# Altium PCB NB2DSK-SPK.PcbDoc
Units mil, origin at the board's own origin, x right, y up, seen from the top; angles counter-clockwise.
Board outline 10614.17 x 2937.01 mil, 2 copper layers (Top Layer, Bottom Layer); 27 components, 35 nets, 104 pads, 52 vias.
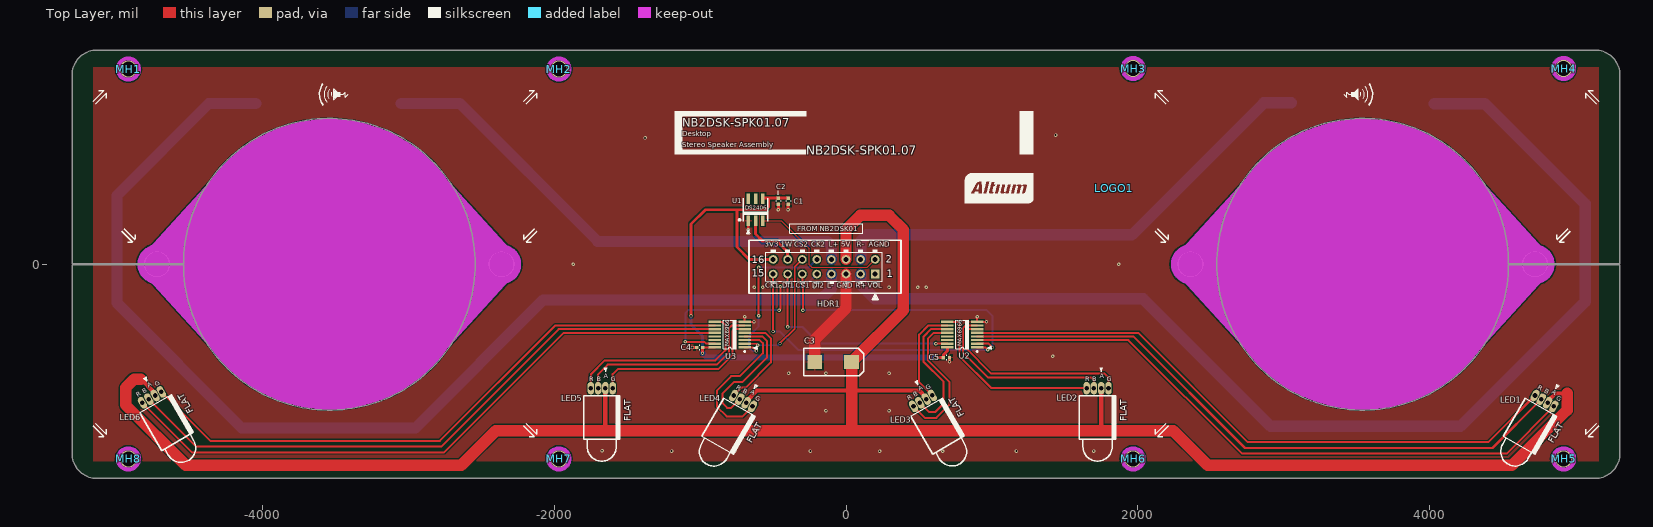
[diagram p0: Top Layer view]
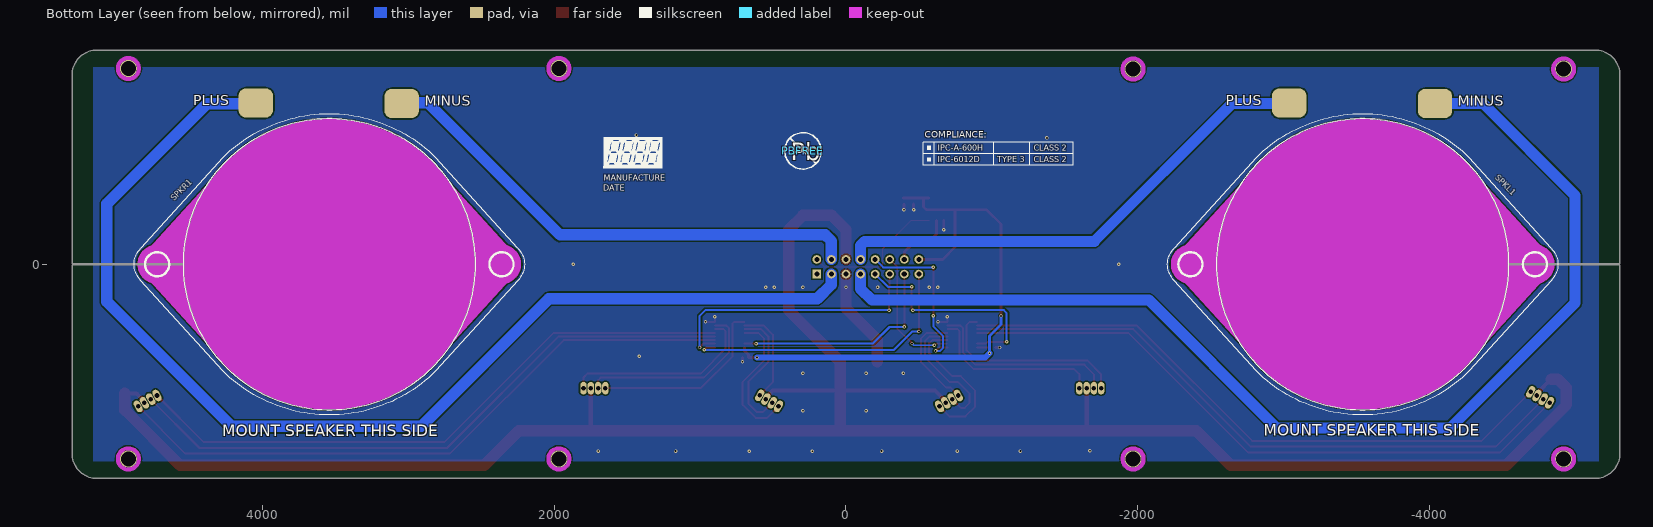
[diagram p1: Bottom Layer view, seen from below]

## Layer stack, top to bottom
Top Layer: signal copper 1.4
Dielectric: core 12.6, FR-4, Dk 4.8
Bottom Layer: signal copper 1.4

## Board outline
-5137.8,-1468.51 cw(c-5137.8,-1299.21) -5307.09,-1299.21 -5307.09,-3.94 -4543.31,-3.94 -4543.3,-3.9 ccw(c-3543.31,0) -4543.3,3.92 -4543.31,3.92 -5307.09,3.92 -5307.09,1299.21 cw(c-5137.8,1299.21) -5137.8,1468.5 5137.8,1468.5 cw(c5137.8,1299.21) 5307.09,1299.21 5307.09,3.92 4543.31,3.92 4543.3,3.92 ccw(c3543.31,0.02) 4543.3,-3.9 4543.31,-3.94 5307.09,-3.94 5307.09,-1299.21 cw(c5137.8,-1299.21) 5137.8,-1468.51

## Design rules (kind name [scope] priority, off if disabled: settings)
Clearance "Pad-Pad Clearance Same Net" [IsPad vs IsPad] p1 off: gap=3.94
Clearance "General Clearance" [All] p2: gap=5
ComponentClearance [All] p1 off: gap=7.87 collisioncheckmode=3 verticalgap=10 showdistances=FALSE
DiffPairsRouting [All] p1: maxlimit=5 minlimit=5 mostfreqgap=5 maxuncoupledlength=200
FabricationTestPointUsage TestPointUsage [All] p1 off: valid=0 allowmultiple=FALSE
FabricationTestpoint Testpoint [All] p1 off: side=3 testpointundercomponent=TRUE minsize=40 maxsize=100 preferedsize=60 minholesize=0 maxholesize=40 preferedholesize=32 testpointgrid=1 allowsidetop=TRUE allowsidebottom=TRUE usegrid=TRUE gridtolerance=0.01
HoleSize [All] p1: absolutevalues=TRUE maxlimit=204.72 minlimit=7.87 maxpercent=80.000 minpercent=20.000
MatchedLengths DiffPair_MatchedLengths [(IsDifferentialPair And (Name = 'DIFF_RX1'))] p1: tolerance=1000 checknetsindiffpair=TRUE checkdiffpairvsdiffpair=TRUE checkothers=TRUE
MinimumAnnularRing [All] p1: minimumring=4.72
PlaneClearance [All] p1: clearance=11.81
PlaneConnect [All] p1: planeconnectstyle=Direct reliefexpansion=19.68 reliefentries=4 reliefconductorwidth=9.84 reliefairgap=9.84
PolygonConnect PolygonConnect_Tight [IsVia] p1: connectstyle=Direct reliefconductorwidth=11.81 reliefentries=4 polygonreliefangle="90 Angle"
PolygonConnect "PolygonConnect - Heatsink" [(HasFootprint('TO-263') AND InNet('VCCINT'))] p2: connectstyle=Relief reliefconductorwidth=10 reliefentries=4 polygonreliefangle="90 Angle"
PolygonConnect [IsPAD] p3: connectstyle=Relief reliefconductorwidth=11.81 reliefentries=4 polygonreliefangle="90 Angle"
RoutingLayers [All] p1: top layer_v5=FALSE bottom layer_v5=FALSE
RoutingVias [All] p1: holewidth=11.81 width=23.62 viastyle="Through Hole" minholewidth=11.81 minwidth=23.62 maxholewidth=19.68 maxwidth=35.43
ShortCircuit ShortCircuit_1 [Net = 'No Net' vs Net = 'No Net'] p1: allowed=TRUE
ShortCircuit [All] p2: allowed=FALSE
SilkscreenOverComponentPads [All] p1: minsilkscreentomaskgap=10
SolderMaskExpansion SolderMaskExpansion_Vias [IsVia] p1: expansion=-25.59
SolderMaskExpansion [All] p2: expansion=2.01
Width [All] p1: maxlimit=98.43 minlimit=5 preferedwidth=5
18 further rules are at their usual default settings.

## Classes and differential pairs
component class U_1WB_DS2406_EPROM: C1 C2 U1
differential pair class DIFF_IN: DIFF_RX0 DIFF_RX1 DIFF_RX2 DIFF_RX3
differential pair class DIFF_OUT: DIFF_TX0 DIFF_TX1 DIFF_TX2 DIFF_TX3

## Components (designator, comment, footprint, x,y, rotation, side; value= is the part's Value field where it differs from the comment)
C1 "0.1uF 16V" CAPC1005-STAR -395.25,433.09 r90 top
C2 "10nF 16V" CAPC1005-STAR -464.13,433.07 r270 top
C3 "220uF 10V" CAPC7343-STAR -88.59,-669.32 r180 top (schematic designator C1)
C4 "0.1uF 16V" CAPC1005-STAR -1003.94,-570.87 r0 top locked (schematic designator C2)
C5 "0.1uF 16V" CAPC1005-STAR 688.98,-639.76 r180 top locked (schematic designator C3)
HDR1 "2x8 Header 0.1\" Staight" HDR2X8 200,-67.01 r180 top
LED1 "RGB LED 5MM" LED-RGB-5MM-RA 4725,-900 r330 top locked
LED2 "RGB LED 5MM" LED-RGB-5MM-RA 1650,-850 r0 top locked
LED3 "RGB LED 5MM" LED-RGB-5MM-RA 462.6,-974.41 r30 top locked
LED4 "RGB LED 5MM" LED-RGB-5MM-RA -770.87,-900 r330 top locked
LED5 "RGB LED 5MM" LED-RGB-5MM-RA -1750,-850 r0 top locked
LED6 "RGB LED 5MM" LED-RGB-5MM-RA -4825,-950 r30 top locked
LOGO1 "Altium" Logo-Altium 1840.64,521.68 r0 top
MH1 "MOUNTING_HOLE_2MM" MOUNTING_HOLE_2MM#1 -4921.26,1338.58 r0 top locked
MH2 "MOUNTING_HOLE_2MM" MOUNTING_HOLE_2MM#2 -1968.5,1338.58 r0 top locked
MH3 "MOUNTING_HOLE_2MM" MOUNTING_HOLE_2MM#2 1968.5,1342.52 r0 top locked
MH4 "MOUNTING_HOLE_2MM" MOUNTING_HOLE_2MM#2 4921.26,1342.52 r0 top locked
MH5 "MOUNTING_HOLE_2MM" MOUNTING_HOLE_2MM#2 4921.26,-1334.65 r0 top locked
MH6 "MOUNTING_HOLE_2MM" MOUNTING_HOLE_2MM#2 1968.5,-1334.65 r0 top locked
MH7 "MOUNTING_HOLE_2MM" MOUNTING_HOLE_2MM#2 -1968.5,-1334.65 r0 top locked
MH8 "MOUNTING_HOLE_2MM" MOUNTING_HOLE_2MM#2 -4921.26,-1334.65 r0 top locked
PBFREE "" LEAD_FREE_S 295.29,777.6 r180 bottom
SPKL1 "SPEAKER_4R_50_60" SPEAKER_4R_50_60 -3543.31,0 r180 bottom locked (schematic designator SPKL)
SPKR1 "SPEAKER_4R_50_60" SPEAKER_4R_50_60 3543.31,0 r180 bottom locked (schematic designator SPKR)
U1 "DS2406" TSOC6 -620.08,374.02 r0 top locked
U2 "MAX6966, QSOP16" QSOP16 797.24,-482.28 r90 top locked (schematic designator U1)
U3 "MAX6966, QSOP16" QSOP16 -797.24,-482.28 r90 top locked (schematic designator U2)

## Footprints (in the part's own frame and the unit in brackets; to place one, negate y for a bottom-side part, rotate by r counter-clockwise, add the part's x,y. Pads: shape width x height; smd on the part's side, far side on the other; paste and mask are expansions set on the pad)
CAPC1005-STAR [mm] "Chip Capacitor 1005"
  rect 0.6x0.6 smd mask+0.038: 1(-0.525,0) 2(0.525,0)
  silkscreen extent -0.05,-0.38 0.05,0.38, body extent -0.57,-0.3 0.57,0.3, height 0.2
CAPC7343-STAR [mm] "Capcacitor SMD 7.3 x 4.3mm (D-Case)"
  rect 2.6x2.4 smd: 1(-3.202,0.007) 2(3.198,0.007)
  silkscreen extent -5.33,-2.39 5.08,2.41, body extent -3.5,-2.03 3.51,2.04, height 1.75
HDR2X8 [mm]
  rect 1.5x1.5 hole 0.9 mask+0.038: 1(0,0)
  round 1.5 hole 0.9 mask+0.038: 2(0,-2.54) 3(2.54,0) 4(2.54,-2.54) 5(5.08,0) 6(5.08,-2.54) 7(7.62,0) 8(7.62,-2.54) 9(10.16,0) 10(10.16,-2.54) 11(12.7,0) 12(12.7,-2.54) 13(15.24,0) 14(15.24,-2.54) 15(17.78,0) 16(17.78,-2.54)
  silkscreen extent -1.27,-3.81 19.05,1.27, body extent -1.27,-3.78 19.05,1.24, height 4.95
LEAD_FREE_S [mil]
  silkscreen extent -125,-125 125,125
LED-RGB-5MM-RA [mil] "LED RGB Right Angle 5mm"
  oval 44x85 hole 31.5 paste+0 mask+0: A(100,0) B(50,0) G(150,0) R(0,0)
  silkscreen extent -50,-500 200,-50
Logo-Altium [mil]
  silkscreen extent -1025,-99 -556,102
MOUNTING_HOLE_2MM#1 [mm] "Non-plated mounting hole for 2mm screw"
  round 3 hole 2.65 unplated mask+0: MOUNT(0,0)
  Top Layer keep-out circle w0.6: c0,0 r1.8
  Bottom Layer keep-out circle w0.6: c0,0 r1.8
  Keep-Out Layer circle w0.6: c0,0 r1.9
MOUNTING_HOLE_2MM#2 [mm] "Non-plated mounting hole for 2mm screw"
  round 3 hole 2.65 unplated paste+0 mask+0: MOUNT(0,0)
  Top Layer keep-out circle w0.6: c0,0 r1.8
  Bottom Layer keep-out circle w0.6: c0,0 r1.8
  Keep-Out Layer circle w0.6: c0,0 r1.9
QSOP16 [mm]
  rect 0.4x2.2 smd mask+0.038: 1(-2.222,-2.6) 2(-1.587,-2.6) 3(-0.952,-2.6) 4(-0.317,-2.6) 5(0.318,-2.6) 6(0.953,-2.6) 7(1.588,-2.6) 8(2.222,-2.6) 9(2.222,2.6) 10(1.587,2.6) 11(0.952,2.6) 12(0.317,2.6) 13(-0.318,2.6) 14(-0.953,2.6) 15(-1.588,2.6) 16(-2.222,2.6)
  silkscreen extent -3.1,-2.73 2.5,1.1, body extent -2.74,-2.4 2.67,2.64, height 0.73
SPEAKER_4R_50_60 [mm] "Header For Connecting Speakers to NB2"
  rrect50% 6x5.08 smd mask+0.038: 1(-12.8,28.1) 2(12.6,28)
  round 4.5 hole 4.2 unplated: M1(-30,0) M1(30,0)
  Keep-Out Layer circle w26: c0,0 r12.3
  Keep-Out Layer lines w8: 13.6,-16.4 28.5,0 13.6,16.4 ; -13.6,-16.4 -28.5,0 -13.6,16.4
  silkscreen extent -34,-26.25 34,26.25, body extent -33.96,-26 33.96,26, height 31.5
TSOC6 [mil]
  rect 25x71 smd mask+1.5: 1(-50,-75) 2(0,-75) 3(50,-75) 4(50,75) 5(0,75) 6(-50,75)
  silkscreen extent -115,-80 85,80, body extent -79,-90 84,91, height 40

## Part data
C1 C4 C5: library part D-101-0080, "Capacitor, Ceramic, 0.1uF 10% 16V 0402 (1005) X7R"
C2: library part D-101-0077, "Capacitor, Ceramic, 10nF 10% 16V 0402 (1005) X7R"
C3: library part D-101-0088, "Capacitor, Tantalum, 220uF 10% 10V MCCT-D (7343-31)"
HDR1: library part D-300-0041, "Header, BOX 2x8, 0.1\", Straight, Raised"
LED1 LED2 LED3 LED4 LED5 LED6: library part D-153-0001, "LED, RGB, 5mm, 540R2GBC-CA, Common Anode"
LOGO1: library part D-000-0003, "Altium Logo for PCB"
MH1 MH2 MH3 MH4 MH5 MH6 MH7 MH8: "2mm Diameter Mounting Hole"
SPKL1 SPKR1: library part D-003-0001, "Speaker, 4 Omh 3W 50mm Cone 60mm Body"
U1: library part D-263-0002, "Dual Addressable Switch Plus 1KB Memory"
U2 U3: library part D-243-0001, "MAX6966, 10 port Constant Current LED Driver, SPI"

## Via types
v1: diameter 23.62, hole 11.81, Top Layer to Bottom Layer, 51 vias
v2: diameter 28, hole 12, Top Layer to Bottom Layer, 1 vias

## Nets (pads, with @x,y where several pads share a name; then routed paths per layer and width w, separated by ;. In a path a pad name is that pad's centre, name@x,y a point inside that pad or via, vN(x,y) a via of type N, cw(c..) or ccw(c..) an arc to the next point about the centre after c; other vN are vias at no path point)
3V3: C1.2 C2.1 C4.2 C5.2 HDR1.16 U1.4 U2.16 U3.16 | length 4139.7
  Top Layer w13.78: C4.2@-982.19,-569.78 U3.16
  Top Layer w19.68: v1(-1062.99,-354.33) -1062.99,275.59 -964.57,374.02 -748,374.02 ; v1(-984.25,-610.24) -984.25,-571.85 C4.2 ; -748.03,344.49 -748.03,118.11 -662.91,32.99 HDR1.16 ; -748,344.52 -748,374.02 ; U1.4@-569.88,453.74 C2.1 C1.2 C1.2@-392.72,453.74 ; -531.5,452.76 -531.5,393.7 -551.18,374.02 -748,374.02 ; v1(610.24,-639.76) C5.2 669.29,-638.78 669.29,-620.08 694.88,-594.49 U2.16@694.88,-572.5
  Bottom Layer w19.68: v1(-1062.99,-354.33) -1062.99,-413.39 -984.25,-492.13 v1(-984.25,-610.24)
  Bottom Layer w39.37: v1(-984.25,-610.24) -954.72,-639.76 v1(610.24,-639.76)
5V0: C3.1 HDR1.6 LED1.A LED2.A LED3.A LED4.A LED5.A LED6.A | length 15166.7
  Top Layer w29.53: -4842.52,-787.4 -4835.72,-787.4 -4744.09,-879.03 LED6.A@-4744.09,-885.83 ; -1650,-1138.19 LED5.A ; LED4.A -684.26,-940.17 -610.24,-866.14 39.37,-866.14 502.04,-866.14 549.2,-913.31 LED3.A ; 1750,-1139.76 LED2.A ; LED1.A 4811.6,-938.9 4864.67,-885.83 4945.02,-885.83
  Top Layer w78.74: -4835.72,-787.4 -4881.89,-787.4 -4940.94,-846.46 -4940.94,-964.57 -4527.56,-1377.95 -2637.8,-1377.95 -2401.57,-1141.73 39.37,-1141.73 ; HDR1.6 0,236.22 98.43,334.65 295.28,334.65 393.7,236.22 393.7,-314.96 39.37,-669.29 39.37,-669.6 39.37,-866.14 39.37,-1141.73 ; 4945.02,-885.83 4945.02,-999.86 4566.93,-1377.95 2480.31,-1377.95 2244.09,-1141.73 39.37,-1141.73
CS1_N: HDR1.11 U2.2 | length 1897.1
  Top Layer w13.78: HDR1.11 -300,-152.76 -295.28,-157.48 v1(-295.28,-314.96) ; U2.2 977.85,-544.78 v1(1003.94,-570.87)
  Bottom Layer w13.78: v1(-295.28,-314.96) 964.57,-314.96 1003.94,-354.33 v1(1003.94,-570.87)
CS2_N: HDR1.12 U3.2 | length 890.9
  Top Layer w9.84: U3.2 -616.63,-544.78 v1(-606.3,-555.12) ; v1(-452.76,-543.31) -350.39,-440.94 -350.39,-17.4 HDR1.12
  Bottom Layer w9.84: v1(-606.3,-555.12) -464.57,-555.12 v1(-452.76,-543.31)
DC_VOL: HDR1.1
DIN1: HDR1.13 U2.15 | length 1504.7
  Top Layer w13.78: v1(-400,-430) HDR1.13 ; v1(616.63,-544.78) U2.15
  Bottom Layer w13.78: v1(-400,-430) -298.35,-430 -185.35,-543 v1@616.63,-543
DIN2: HDR1.9 U3.15 | length 1506.8
  Top Layer w13.78: v1(-1102.36,-531.5) -971.46,-531.5 -958.17,-544.78 U3.15 ; v1(-459,-314.96) -450,-305.96 v1(-450,-155)
  Bottom Layer w13.78: v1(-1102.36,-531.5) -1102.36,-334.65 -1082.68,-314.96 v1(-459,-314.96) ; v1(-450,-155) -287.99,-155 HDR1.9
GND: C1.1 C2.2 C3.2 C4.1 C5.1 HDR1.5 U1.1 U2.8 U3.8 | length 1084.1
  Top Layer w13.78: v1(-694.88,-360.24) U3.8 v1(-631,-394.78) ; v1(899.61,-360.24) U2.8 v1(963.48,-394.78)
  Top Layer w19.68: v1(-1053.15,-570.87) C4.1 ; v1(-670.08,237.01) U1.1 ; v1(-464.13,374.02) C2.2 ; v1(-397.2,374.02) C1.1@-397.2,412.4 ; v1(709.65,-668.31) C5.1
  Top Layer w78.74: C3.2 -214.49,-516.49 -0.05,-302.05 v1(0,-157.48) HDR1.5
  other v1: 230.02,-1283 663.09,-1283 -1195.98,-1281 -762.91,-1281 -244,-1281 1169,-1281 1698.91,-1281 -1673,-1278 -137.8,-1003.94 295.28,-1003.94 -393.7,-748.03 -137.8,-748.03 295.28,-748.03 1417.32,-629.92 -629.92,-157.48 -570.87,-157.48 -216.54,-157.48 295.28,-157.48 492.13,-157.48 551.18,-157.48 -1870.08,0 1870.08,0 -1377.95,866.14 1437.01,885.83
L_MINUS: HDR1.7 SPKL1.2 | length 7705.2
  Bottom Layer w75: SPKL1.2@-4045.28,1102.36 -4370.08,1102.36 -5000,472.44 -5000,-265.75 -4143.7,-1122.05 -2952.76,-1122.05 -2076.77,-246.06 -177.17,-246.06 -100,-168.9 HDR1.7
L_PLUS: HDR1.8 SPKL1.1 | length 3450.7
  Bottom Layer w75: SPKL1.1@-3051.18,1102.36 -3039.37,1102.36 -2647.64,1102.36 -1702.76,157.48 -127.95,157.48 -100,129.53 HDR1.8
NetLED1_B: LED1.B U2.4 | length 4324.3
  Top Layer w13.78: U2.4 1971.16,-494.78 2736.22,-1259.84 4433.46,-1259.84 LED1.B
NetLED1_G: LED1.G U2.3 | length 4412.4
  Top Layer w13.78: U2.3 1937.11,-519.78 2716.54,-1299.21 4530.69,-1299.21 LED1.G
NetLED1_R: LED1.R U2.5 | length 4269.1
  Top Layer w13.78: U2.5 2005.22,-469.78 2755.91,-1220.47 4404.53,-1220.47 LED1.R
NetLED2_B: LED2.B U2.7 | length 1304.7
  Top Layer w13.78: U2.7 820.37,-419.78 801.34,-438.82 801.34,-604.49 974.41,-777.56 1683.07,-777.56 1700,-794.49 LED2.B
NetLED2_G: LED2.G U2.6 | length 1329.8
  Top Layer w13.78: U2.6 838.48,-444.78 826.77,-456.5 826.77,-580.71 994.09,-748.03 1771.65,-748.03 1800,-776.38 LED2.G
NetLED2_R: LED2.R U2.9 | length 1275
  Top Layer w13.78: U2.9 766.63,-394.78 777.56,-405.71 777.56,-629.92 997.64,-850 LED2.R
NetLED3_B: LED3.B U2.11 | length 915
  Top Layer w13.78: LED3.B 570.27,-1013.78 610.24,-1013.78 669.29,-954.72 669.29,-807.09 531.5,-669.29 531.5,-495.87 582.58,-444.78 U2.11
NetLED3_G: LED3.G U2.10 | length 673.4
  Top Layer w13.78: LED3.G 501.97,-808.88 501.97,-482.28 564.47,-419.78 U2.10
NetLED3_R: LED3.R U2.12 | length 980.5
  Top Layer w13.78: LED3.R 541.34,-1053.15 620.08,-1053.15 708.66,-964.57 708.66,-807.09 561.02,-659.45 561.02,-511.81 603.05,-469.78 U2.12
NetLED4_B: LED4.B U3.4 | length 908.3
  Top Layer w13.78: -787.4,-984.25 -814.96,-984.25 -846.46,-952.76 -846.46,-885.83 -767.72,-807.09 -708.66,-807.09 -543.31,-641.73 -543.31,-525 -573.52,-494.78 U3.4 ; -787.11,-984.54 LED4.B
NetLED4_G: LED4.G U3.3 | length 1033.9
  Top Layer w13.78: U3.3 -592.42,-519.78 -570.87,-541.34 -570.87,-610.24 -728.35,-767.72 -787.4,-767.72 -885.83,-866.14 -885.83,-976.38 -818.9,-1043.31 -709.27,-1043.31 LED4.G
NetLED4_R: LED4.R U3.5 | length 709.3
  Top Layer w13.78: LED4.R -717.32,-846.46 -688.98,-846.46 -515.75,-673.23 -515.75,-507.87 -553.84,-469.78 U3.5
NetLED5_B: LED5.B U3.7 | length 1336.9
  Top Layer w13.78: LED5.B -1700,-755.12 -1633.86,-688.98 -885.83,-688.98 -802.99,-606.14 -802.99,-438.82 -783.96,-419.78 U3.7
NetLED5_G: LED5.G U3.6 | length 1225.3
  Top Layer w13.78: LED5.G -1600,-753.54 -1564.96,-718.5 -875.98,-718.5 -777.56,-620.08 -777.56,-456.5 -765.85,-444.78 U3.6
NetLED5_R: LED5.R U3.9 | length 1342.3
  Top Layer w13.78: LED5.R -1750,-755.91 -1653.54,-659.45 -895.67,-659.45 -826.77,-590.55 -826.77,-415.55 -847.54,-394.78 U3.9
NetLED6_B: LED6.B U3.11 | length 4350.2
  Top Layer w13.78: LED6.B -4456.7,-1250 -2775.59,-1250 -1970.37,-444.78 U3.11
NetLED6_G: LED6.G U3.10 | length 4262.1
  Top Layer w13.78: LED6.G -4359.47,-1210.63 -2785.43,-1210.63 -1994.59,-419.78 U3.10
NetLED6_R: LED6.R U3.12 | length 4405.4
  Top Layer w13.78: LED6.R -4485.63,-1289.37 -2755.91,-1289.37 -1936.32,-469.78 U3.12
ONE_WIRE: HDR1.14 U1.2 | length 414.8
  Top Layer w19.68: U1.2 -620.08,206.69 -570.87,157.48 -472.44,157.48 -400,85.04 HDR1.14
ONE_WIRE.PIO2: U1.6
PIO1: HDR1.2 U1.3 | length 988.5
  Top Layer w6: U1.3 -444.69,299.02 -251.97,106.3 -251.97,-3.94 -236.22,-19.69 147.32,-19.69
  Top Layer w7: 147.32,-19.69 HDR1.2
R_MINUS: HDR1.4 SPKR1.2 | length 3473.5
  Bottom Layer w78.74: HDR1.4 100,159.06 141.73,200.79 1960.63,200.79 2866.14,1106.3 3047.24,1106.3 SPKR1.2@3055.12,1106.3
R_PLUS: HDR1.3 SPKR1.1 | length 7787.1
  Bottom Layer w78.74: HDR1.3 100,-139.37 196.85,-236.22 2037.4,-236.22 2913.39,-1112.2 4212.6,-1112.2 5068.9,-255.91 5068.9,413.39 4379.92,1102.36 4047.24,1102.36 SPKR1.1@4035.43,1102.36
SCLK1: HDR1.15 U2.1 | length 1997.9
  Top Layer w13.78: v1@-500,-460.63 HDR1.15 ; U2.1 955.61,-569.78 v1(972.44,-586.61)
  Bottom Layer w13.78: v1(-500,-461) -455,-461 -329.39,-586.61 v1(972.44,-586.61)
SCLK2: HDR1.10 U3.1 | length 1153.4
  Top Layer w13.78: U3.1 -638.88,-569.78 v1(-614.17,-594.49) ; v1(-599,-353) v1(-599,-21)
  Bottom Layer w13.78: v1(-614.17,-594.49) -645.51,-594.49 -666,-574 -666,-493 -599,-426 v1(-599,-353) ; v1(-599,-21) -253.99,-21 HDR1.10
pads on no net: MH1.MOUNT MH2.MOUNT MH3.MOUNT MH4.MOUNT MH5.MOUNT MH6.MOUNT MH7.MOUNT MH8.MOUNT SPKL1.M1 SPKR1.M1 U1.5 U2.13 U2.14 U3.13 U3.14
copper on no net:
  other v2: 4921.26,1342.52

## Polygon pours and split planes (outlines as drawn)
GND on Top Layer "MAIN_TL" (solid, remove dead copper, pour order 1000): -5055.12,1350 5161.42,1350 5161.42,-1350 -5161.42,-1350 -5161.42,1350
GND on Bottom Layer "GND" (solid, remove dead copper, pour order 1000): -5161.42,1350.39 -5161.42,-1350.39 5161.42,-1350.39 5161.42,1350.39

## Keep-outs
Keep-Out Layer:
  circle w78.74: c4724.41,0 r95.47
  circle w78.74: c2362.2,0 r95.47
  circle w78.74: c-2362.2,0 r95.47
  circle w78.74: c-4724.41,0 r95.47

## Silkscreen, mask and mechanical layers (free items; w line width, h text height)
Top Overlay:
  drawing of 237 lines, arcs and shapes, not listed
  text "NB2DSK-SPK01.07" at -1122.05,921.54 h98.43
  text "Desktop" at -1122.05,863.54 h60
  text "Stereo Speaker Assembly" at -1122.05,787.56 h60
  text "NB2DSK-SPK01.07" at -271.85,751.54 h60
  text "DS2406" at -691.73,372.62 h28
  text "FROM NB2DSK01" at -333.49,228.02 h35
  text "3V3" at -555.94,104.88 h60
  text "1W" at -448,105 h60
  text "CS2" at -356,105 h60
  text "CK2" at -240,105 h60
  text "L+" at -120,105 h60
  text "5V" at -31.81,104.88 h60
  text "R-" at 72.87,104.88 h60
  text "AGND" at 154.47,105 h60
  text "L-" at -128.5,-175 h60
  text "CK1" at -555,-176 h60
  text "DI1" at -437,-176 h60
  text "CS1" at -346,-176 h60
  text "DI2" at -230.75,-175.63 h60
  text "GND" at -64.52,-175.98 h60
  text "R+" at 65.47,-175.98 h60
  text "VOL" at 148.49,-175.98 h60
  text "MAX6966" at -799.21,-562.99 h28 r90
  text "MAX6966" at 795.28,-562.99 h28 r90
Bottom Overlay:
  drawing of 1069 lines, arcs and shapes, not listed
  text "COMPLIANCE:" at -538.92,868.05 h45
  text "CLASS 2" at -1288.92,778.05 h40
  text "IPC-A-600H" at -628.92,778.05 h40
  text "CLASS 2" at -1288.92,698.05 h40
  text "TYPE 3" at -1038.92,698.05 h40
  text "IPC-6012D" at -628.92,698.05 h40
  text "MANUFACTURE" at 1662.27,572.58 h40
  text "DATE" at 1663.37,505.78 h40
Top Solder:
  circle w78.74: c4724.41,0 r95.47
  circle w78.74: c2362.2,0 r95.47
  circle w78.74: c-2362.2,0 r95.47
  circle w78.74: c-4724.41,0 r95.47
  circle w78.74: c-4921.26,-1334.65 r49.21
  circle w78.74: c-1968.5,-1334.65 r49.21
  circle w78.74: c1968.5,-1330.71 r49.21
  circle w78.74: c4921.26,-1330.71 r49.21
  circle w78.74: c4921.26,1342.52 r49.21
  circle w78.74: c1968.5,1342.52 r49.21
  circle w78.74: c-1968.5,1338.58 r49.21
  circle w78.74: c-4921.26,1338.58 r49.21
Bottom Solder:
  circle w100: c3546.1,-2.68 r1005.06
  circle w100: c-3540.51,-2.68 r1005.06
  lines w78.74: -5281.45,-0.01 cw(c-5307.09,-3.94) -5281.15,-3.94 -5281.15,-1299.21 ccw(c-5137.8,-1299.21) -5137.8,-1442.57 0,-1442.57 5137.8,-1442.57 ccw(c5137.8,-1299.21) 5281.15,-1299.21 5281.15,-3.94 cw(c5307.09,-3.94) 5281.45,-0.01 cw(c5307.09,3.92) 5281.15,3.92 5281.15,1299.21 ccw(c5137.8,1299.21) 5137.8,1442.57 0,1442.57 -5137.8,1442.57 ccw(c-5137.8,1299.21) -5281.15,1299.21 -5281.15,3.92 cw(c-5307.09,3.92) -5281.45,-0.01
  lines w100: -4785.78,-114.63 cw(c-4662.56,-2.68) -4785.75,109.3 -4364.07,573.44 cw(c-3540.51,-2.68) -4189.14,765.07 cw(c-4075.94,642.99) -4174.97,776.82 cw(c-3540.51,-2.68) -2906.06,776.82 cw(c-3005.08,642.99) -2891.89,765.07 ; -4785.78,109.27 ccw(c-4662.56,-2.68) -4785.75,-114.66 -4364.07,-578.79 ccw(c-3540.51,-2.68) -4189.14,-770.42 ccw(c-4075.94,-648.35) -4174.97,-782.18 ccw(c-3540.51,-2.68) -2906.06,-782.18 ccw(c-3005.08,-648.35) -2891.89,-770.42 ccw(c-3540.51,-2.68) -2716.96,-578.79 -2295.27,-114.66 ccw(c-2418.46,-2.68) -2251.98,-2.68 ; -2716.96,573.44 -2295.27,109.3 cw(c-2418.46,-2.68) -2251.98,-2.68 ; -2295.25,-114.63 ccw(c-2418.46,-2.68) -2251.98,-2.68 ; -2295.25,109.27 cw(c-2418.46,-2.68) -2251.98,-2.68 ; 2300.84,-114.63 cw(c2424.06,-2.68) 2300.86,109.3 2722.55,573.44 cw(c3546.1,-2.68) 2897.48,765.07 cw(c3010.67,642.99) 2911.65,776.82 cw(c3546.1,-2.68) 4180.56,776.82 cw(c4081.54,642.99) 4194.73,765.07 ; 2300.84,109.27 ccw(c2424.06,-2.68) 2300.86,-114.66 2722.55,-578.79 ccw(c3546.1,-2.68) 2897.48,-770.42 ccw(c3010.67,-648.35) 2911.65,-782.18 ccw(c3546.1,-2.68) 4180.56,-782.18 ccw(c4081.54,-648.35) 4194.73,-770.42 ccw(c3546.1,-2.68) 4369.66,-578.79 4791.34,-114.66 ccw(c4668.15,-2.68) 4834.63,-2.68 ; 4369.66,573.44 4791.34,109.3 cw(c4668.15,-2.68) 4834.63,-2.68 ; 4791.37,-114.63 ccw(c4668.15,-2.68) 4834.63,-2.68 ; 4791.37,109.27 cw(c4668.15,-2.68) 4834.63,-2.68
  lines w200: -4568.51,269.14 ccw(c-4171.75,-0.49) -4558.37,-284.47 ; -2522.34,-284.47 ccw(c-2908.96,-0.49) -2512.2,269.14 ; 2518.11,269.14 ccw(c2914.86,-0.49) 2528.24,-284.47 ; 4562.31,-284.47 ccw(c4175.69,-0.49) 4572.44,269.14
1. PCB Boundary:
  lines w7.87: -4543.31,-3.94 -5307.09,-3.94 -5307.09,-1299.21 ccw(c-5137.8,-1299.21) -5137.8,-1468.51 0,-1468.51 5137.8,-1468.51 ccw(c5137.8,-1299.21) 5307.09,-1299.21 5307.09,-3.94 4543.31,-3.94 ; -4543.31,3.92 -5307.09,3.92 -5307.09,1299.21 cw(c-5137.8,1299.21) -5137.8,1468.5 0,1468.5 5137.8,1468.5 cw(c5137.8,1299.21) 5307.09,1299.21 5307.09,3.92 4543.31,3.92 ; -4543.3,-3.9 ccw(c-3543.31,0) -4543.3,3.92 ; 4543.3,-3.9 cw(c3543.31,0.02) 4543.3,3.92
4. Dimensions:
  circle w1023.62: c-3543.31,0 r492.13
  circle w1023.62: c3543.31,0 r492.13
6. FabNotes:
  drawing of 719 lines, arcs and shapes, not listed
  text "NB2DSK-SPK01" at 8487.8,4749.89 h45
  text "DESIGN INFORMATION" at 6273.68,4749.11 h45
  text "BOARD NAME:" at 7753.68,4749.11 h45
  text "BOARD TECHNOLOGY" at 6273.68,4649.11 h45
  text "BOARD SIZE (REFER ALSO PROFILING INFORMATION)" at 8173.68,4649.11 h45
  text "10" at 6357.18,4562.93 h45
  text "269.6mm" at 8280.77,4559.58 h45
  text "10" at 6895.69,4556.12 h45
  text "74.6mm" at 9186.28,4555.65 h45
  text "10" at 7445.69,4551.12 h45
  text "X" at 8908.68,4529.11 h45
  text "(MIN. TRACK/   PADS  /   CLEARANCE     IN 0.001'')" at 6213.68,4449.11 h45
  text "MINIMUM ANNULAR RING 0.05MM (0.002'') EXTERNAL PER IPC-2221 CLASS 3 LEVEL C AND IS TH" at 6273.68,4349.11 h45
  text "MANUFACTURING REGISTRATION ALLOWANCE" at 6273.68,4259.11 h45
  text "LAND SIZE CALCULATION MINIMUM - NOMINAL HOLE SIZE + 0.508MM (0.020'')" at 6273.68,4149.11 h45
  text "X" at 7753.68,3979.11 h45
  text "X" at 8453.68,3979.11 h45
  text "CIRCUIT TYPE:" at 6273.68,3969.11 h45
  text "SS" at 7173.68,3969.11 h45
  text "DS" at 7873.68,3969.11 h45
  text "PTH" at 8573.68,3969.11 h45
  text "ML" at 9003.68,3969.11 h45
  text "No. of Layers" at 9273.68,3969.11 h45
  text "FINGER CONNECTOR DIM PER:" at 6273.68,3849.11 h45
  text "AS SHOWN" at 9273.68,3849.11 h45
  text "No. OFF TOTAL" at 6933.68,3739.11 h45
  text "ONE SIDE" at 8573.68,3739.11 h45
  text "BOTH SIDES" at 9273.68,3729.11 h45
  text "X" at 7753.68,3629.11 h45
  text "X" at 6600,3625 h45
  text "VIAS:" at 6273.68,3624.11 h45
  text "NONE" at 6723.68,3624.11 h45
  text "FEED THRU'" at 7173.68,3624.11 h45
  text "TENTED" at 7873.68,3624.11 h45
  text "BURIED LAYER SEQUENCE" at 8573.68,3624.11 h45
  text "X" at 7048.68,3509.11 h45
  text "UNIQUE DRILL" at 7173.68,3504.11 h45
  text "2 SIZE" at 7873.68,3504.11 h45
  text "BLIND LAYER SEQUENCE" at 8573.68,3504.11 h45
  text "Layer Stack Manager (PCB)" at 7668.68,3414.11 h45
  text "X" at 9153.68,3414.11 h45
  text "AS SHOWN" at 9273.68,3414.11 h45
  text "LAYER CONSTRUCTION PER:" at 6273.68,3409.11 h45
  text "Altium Designer 6.6" at 9267.33,3304.41 h45
  text "ARTWORK:" at 6273.68,3299.11 h45
  text "MANUAL" at 7173.68,3299.11 h45
  text "DIGITISED" at 7873.68,3299.11 h45
  text "X" at 8453.68,3299.11 h45
  text "CAD" at 8573.68,3299.11 h45
  text "TYPE" at 9003.68,3299.11 h45
  text "ARTWORK/PATTERN MASTER LIST" at 6273.68,3114.11 h45
  text "DESCRIPTION" at 6323.68,3019.11 h45
  text "DRAWING No./CAD FILE REF." at 7058.68,3019.11 h45
  text "LAYER NAME" at 8683.68,3019.11 h45
  text "GERBER FILE REF" at 9500.69,3016.12 h45
  text "PCB FILE" at 6263.68,2919.11 h45
  text "NB2DSK-SPK.PCBDOC" at 7065.2,2916.85 h45
  text "PcbDoc" at 8295.69,2916.12 h45
  text "Top Paste Mask" at 8617.7,2819.11 h45
  text "NB2DSK-SPK" at 7070.2,2816.85 h45
  text "GTP" at 8342.13,2817.17 h45
  text "GTP" at 10295.69,2816.12 h45
  text "GERBER FILE" at 6263.68,2814.11 h45
  text "GTO" at 8342.13,2718.74 h45
  text "GTO" at 10293.68,2718.13 h45
  text "NB2DSK-SPK" at 7070.2,2716.85 h45
  text "Top Overlay" at 8617.7,2717.1 h45
  text "GERBER FILE" at 6263.68,2714.11 h45
  text "Top Solder Mask" at 8617.7,2621.12 h45
  text "GTS" at 8342.13,2620.32 h45
  text "NB2DSK-SPK" at 7070.2,2616.85 h45
  text "GTS" at 10295.69,2616.12 h45
  text "GERBER FILE" at 6263.68,2614.11 h45
  text "TOP LAYER" at 8617.7,2519.11 h45
  text "NB2DSK-SPK" at 7070.2,2516.85 h45
  text "GTL" at 10295.69,2516.12 h45
  text "GERBER FILE" at 6263.68,2514.11 h45
  text "GTL" at 8342.13,2514.02 h45
  text "NB2DSK-SPK" at 7070.2,2221.85 h45
  text "BOTTOM LAYER" at 8602.7,2219.11 h45
  text "GBL" at 8327.13,2216.23 h45
  text "GBL" at 10280.69,2216.12 h45
  text "GERBER FILE" at 6248.68,2214.11 h45
  text "GBS" at 8327.13,2121.74 h45
  text "Bottom Solder Mask" at 8602.7,2121.12 h45
  text "NB2DSK-SPK" at 7070.2,2116.85 h45
  text "GBS" at 10280.69,2116.12 h45
  text "GERBER FILE" at 6248.68,2114.11 h45
  text "GBO" at 8327.13,2019.37 h45
  text "Bottom Overlay" at 8602.7,2019.11 h45
  text "NB2DSK-SPK" at 7070.2,2016.85 h45
  text "GBO" at 10280.69,2016.12 h45
  text "GERBER FILE" at 6248.68,2014.11 h45
  text "GBP" at 10280.69,1921.12 h45
  text "Bottom Paste Mask" at 8602.69,1919.11 h45
  text "NB2DSK-SPK" at 7070.2,1916.85 h45
  text "GBP" at 8327.13,1917.17 h45
  text "GERBER FILE" at 6243.68,1914.11 h45
  text "APERTURE LIST" at 6263.68,1119.37 h45
  text "APR" at 8335.06,1116.38 h45
  text "DRILL REPORT" at 6263.68,1019.37 h45
  text "DRR" at 8335.06,1016.38 h45
  text "DRILL FILE" at 6253.21,916.73 h45
  text "DRL" at 8330.14,911.06 h45
  text "TXT" at 8324.07,816.34 h45
  text "EXCELLON DRILL" at 6250.25,813.38 h45
  text "MATERIAL:" at 6273.68,608.45 h45
  text "GLASS FIBRE EPOXY RESIN NEMA GRADE FR4-08 (IPC-4101) - WITH TG170" at 7283.68,598.45 h45
  text "X" at 7178.68,593.45 h45
  text "THICKNESS:" at 6583.68,483.45 h45
  text "0.8mm" at 7283.68,483.45 h45
  text "1.2mm" at 7978.68,483.45 h45
  text "1.6mm" at 8673.67,483.47 h45
  text "2.4mm" at 9373.68,483.45 h45
  text "3.2mm" at 10073.68,483.45 h45
  text "X" at 8578.68,478.45 h45
  text "2" at 8427.15,369.48 h45
  text "TOLERANCE:" at 6578.68,363.45 h45
  text "OTHER +/-" at 9373.68,363.45 h45
  text "X" at 7178.68,358.45 h45
  text "IN A/W IPC-D-300G CLASS" at 7305.18,355.58 h45
  text "2" at 8427.15,247.43 h45
  text "BOW & TWIST:" at 6578.17,243.45 h45
  text "AS SHOWN" at 9378.68,238.45 h45
  text "IN A/W IPC-D-300G CLASS" at 7305.18,235.58 h45
  text "X" at 7178.68,233.45 h45
  text "COPPER THICKNESS (FINISHED)" at 6482.26,125.38 h45
  text "18um" at 7283.68,23.45 h45
  text "35um" at 8348.68,23.45 h45
  text "70um" at 9383.68,23.45 h45
  text "OUTER:" at 6624,19.08 h45
  text "X" at 8240.69,15.46 h45
  text "ROUTED HOLE" at -4075,-50 h100
  text "ROUTED HOLE" at 3075,-50 h100
  text "18um" at 7283.68,-96.55 h45
  text "35um" at 8348.68,-96.55 h45
  text "70um" at 9383.68,-96.55 h45
  text "INNER SIGNAL:" at 6624,-99.03 h45
  text "X" at 8238.68,-104.54 h45
  text "INNER PWR:" at 6624,-217.14 h45
  text "18um" at 7283.68,-216.55 h45
  text "35um" at 8348.68,-216.55 h45
  text "70um" at 9383.68,-216.55 h45
  text "X" at 8243.68,-221.55 h45
  text "STRUCTURE:" at 6273.68,-336.55 h45
  text "REFER" at 7283.68,-336.55 h45
  text "AS PER DRAWING No." at 7278.68,-461.55 h45
  text "AS SHOWN" at 9378.68,-461.55 h45
  text "X" at 9278.68,-466.55 h45
  text "DRILLING:" at 6273.68,-571.55 h45
  text "COMPONENT SIDE" at 7283.68,-661.55 h45
  text "SOLDER SIDE" at 8338.68,-661.55 h45
  text "VIEWED FROM:" at 6549.19,-669.89 h45
  text "X" at 7178.68,-671.55 h45
  text "REFERENCE:" at 6558.68,-781.55 h45
  text "AS SHOWN" at 7278.68,-786.55 h45
  text "PATTERN MASTER LIST" at 8343.68,-786.55 h45
  text "X" at 9278.68,-786.55 h45
  text "NC_DRILL FILES" at 9378.68,-786.55 h45
  text "X" at 7178.68,-791.55 h45
  text "20um" at 8348.68,-901.55 h45
  text "PTH MINIMUM COPPER THICKNESS:" at 6561,-906.12 h45
  text "X" at 8243.68,-906.55 h45
  text "OTHER" at 9378.68,-906.55 h45
  text "NPTH:" at 6557.07,-1020.29 h45
  text "TENTED" at 7278.68,-1026.55 h45
  text "X" at 8243.68,-1026.55 h45
  text "PADS REMOVED" at 8343.68,-1026.55 h45
  text "REMOVE PADS" at 9378.68,-1026.55 h45
  text "X" at 7178.68,-1031.55 h45
  text "2nd DRILL" at 7278.68,-1146.55 h45
  text "BOTH" at 8343.68,-1146.55 h45
  text "AS SHOWN" at 8828.68,-1146.55 h45
  text "NONE" at 9378.68,-1146.55 h45
  text "BOARD FINISH:" at 6273.68,-1261.55 h45
  text "X" at 7178.68,-1266.55 h45
  text "ETCHING" at 7278.68,-1266.55 h45
  text "REFER PATTERN MASTER LIST" at 8343.68,-1266.55 h45
  text "LEGEND / SCREEN PRINT:" at 6525.57,-1382.49 h45
  text "NONE" at 7612.26,-1382.18 h45
  text "COMPONENT" at 8343.56,-1383.56 h45
  text "SOLDER" at 9379.98,-1386.12 h45
  text "X" at 8243.56,-1388.56 h45
  text "X" at 9279.98,-1391.12 h45
  text "WHITE" at 7281.56,-1496.35 h45
  text "COLOUR:" at 6757.85,-1500.6 h45
  text "X" at 7181.56,-1501.35 h45
  text "YELLOW" at 8343.68,-1506.55 h45
  text "OTHER" at 9378.68,-1506.55 h45
  text "SOLDER RESIST:" at 6517.7,-1626.59 h45
  text "X" at 7178.68,-1626.55 h45
  text "LIQUID PHOTOIMAGEABLE" at 7278.68,-1626.55 h45
  text "SCREEN PRINT" at 8828.68,-1626.55 h45
  text "FINISH:" at 6769.67,-1744.7 h45
  text "MATTE" at 7278.68,-1746.55 h45
  text "GLOSS" at 7778.68,-1746.55 h45
  text "X" at 7673.68,-1751.55 h45
  text "COLOUR:" at 6757.85,-1862.81 h45
  text "BLACK" at 7278.68,-1866.55 h45
  text "GREEN" at 7778.68,-1866.55 h45
  text "YELLOW" at 8343.68,-1866.55 h45
  text "BLUE" at 8828.68,-1866.55 h45
  text "OTHER" at 9378.68,-1866.55 h45
  text "X" at 7173.68,-1871.55 h45
  text "TRACK FINISH:" at 6273.68,-1981.55 h45
  text "SELECTIVE SOLDER (HASL)" at 7278.68,-1986.55 h45
  text "REFLOW SOLDER" at 8828.68,-1986.55 h45
  text "0.1um - 0.2um ELECTROLESS GOLD OVER 3um NICKEL" at 7281.48,-2099.03 h45
  text "X" at 7179.11,-2102.97 h45
  text "IMMERSION GOLD" at 7278.68,-2226.55 h45
  text "OTHER" at 8828.68,-2226.55 h45
  text "BOARD EDGES ARE ROUNDED AS SHOWN" at -2210,-2325 h150
  text "EDGE BOARD" at 6273.68,-2341.55 h45
  text "1.3um HARD GOLD OVER 5um     NICKEL / TIN-NICKEL" at 7278.68,-2346.55 h45
  text "CONTACTS:" at 6273.68,-2426.55 h45
  text "HARD FINISH GOLDE PLATE" at 7278.68,-2466.55 h45
  text "OTHER" at 8828.68,-2466.55 h45
  text "AS SHOWN" at 7278.68,-2586.55 h45
  text "REFER" at 8828.68,-2586.55 h45
  text "PROFILING:" at 6273.68,-2706.55 h45
  text "AS DIMENSIONED, MEASURED AND CUT FROM SPECIFIED DATUM." at 7278.68,-2706.55 h45
  text "X" at 7178.68,-2711.55 h45
  text "REFER PCB BLANK DWG No." at 7283.68,-2821.55 h45
  text "USE PROFILE / ROUTE TAPE SUPPLIED (REFER PATTERN MASTER LIST)" at 7283.68,-2941.55 h45
  text "SQUARE CUT" at 7283.68,-3061.55 h45
  text "X" at 7873.68,-3061.55 h45
  text "N.C. ROUTE" at 7983.68,-3061.55 h45
  text "V. SCORE" at 8683.68,-3061.55 h45
  text "BLANK" at 9383.68,-3061.55 h45
  text "ACCEPTABILITY:" at 6273.68,-3166.55 h45
  text "MATERIALS AND WORKMANSHIP FOR ALL PRINTED WIRING BOARDS TO MEET" at 7148.68,-3171.55 h45
  text "OR EXCEED THE REQUIREMENTS OF:" at 7148.68,-3281.55 h45
  text "NANOBOARD NB2DSK-SPK" at -2271.32,-3376.55 h250
  text "IPC-6011/12 AND IPC-A-600E" at 7288.68,-3386.55 h45
  text "1" at 8688.68,-3386.55 h45
  text "2" at 9038.68,-3386.55 h45
  text "3" at 9388.92,-3388.99 h45
  text "X" at 8933.68,-3391.55 h45
  text "X" at 7183.68,-3396.55 h45
  text "UL CERTIFICATION" at 7288.68,-3506.55 h45
  text "AUSTEL" at 8688.68,-3506.55 h45
  text "X" at 7183.68,-3511.55 h45
  text "ML-P-55110F GRP" at 7268.68,-3626.55 h45
  text "A" at 7988.68,-3626.55 h45
  text "B" at 8338.68,-3626.55 h45
  text "AS2546" at 8688.68,-3626.55 h45
  text "OTHER" at 9388.68,-3626.55 h45
  text "ADDITIONAL REQUIREMENTS:" at 6265.73,-3756.51 h45
  text "REV.07" at -666.32,-3781.55 h250
  text "NONE" at 7287.34,-3858.01 h45
  text "SAMPLE PLAN" at 7987.34,-3858.01 h45
  text "MIL-P-55110E SERIAL Nos. PER ORDER" at 8766.08,-3858.01 h45
  text "X" at 7181.08,-3858.6 h45
  text "MICROSECTION:" at 6470.45,-3862.81 h45
  text "NONE" at 7291.08,-3983.52 h45
  text "CERTIFICATION:" at 6466.52,-3988.79 h45
  text "A" at 8764.27,-3992.69 h45
  text "MIL-P-55110E GRP" at 7983.01,-3994.66 h45
  text "B" at 8975.53,-3995.8 h45
  text "1" at 9947.97,-3999.74 h45
  text "2" at 10159.23,-4002.85 h45
  text "3" at 10375.77,-4002.85 h45
  text "IPC CLASS:" at 9380.65,-4006.47 h45
  text "RoHS Compliant" at 7291.08,-4109.5 h45
  text "X" at 7181.08,-4114.5 h45
  text "X" at 7879.43,-4118.01 h45
  text "QUALITY RELEASE REPORT" at 7983.01,-4120.64 h45
  text "OTHER" at 9384.74,-4122.61 h45
  text "NONE" at 7288.92,-4235.96 h45
  text "REQUIRED (100% NETS & PADS)" at 7988.92,-4235.96 h45
  text "ELECTRICAL TEST:" at 6466.52,-4240.76 h45
  text "X" at 7883.92,-4240.96 h45
  text "PER ORDER" at 9388.68,-4241.55 h45
  text "2 SIDES" at 8751.75,-4361.43 h45
  text "MIN. PITCH" at 9384.98,-4361.43 h45
  text "0.6mm" at 9919.98,-4361.43 h45
  text "NONE" at 7288.92,-4361.94 h45
  text "1 SIDE" at 7983.92,-4361.94 h45
  text "SURFACE MOUNT:" at 6462.58,-4366.75 h45
  text "X" at 7875,-4375 h45
  text "FOIL" at 8767.66,-4485.56 h45
  text "NONE" at 7988.92,-4489.5 h45
  text "LEGEND" at 9111.36,-4489.5 h45
  text "REFER" at 9583.92,-4489.5 h45
  text "Bottom Overlay" at 9903.76,-4488.95 h45
  text "X" at 9005.41,-4491.04 h45
  text "X" at 9477.85,-4491.04 h45
  text "MANUFACTURER'S ID/LOGO:" at 6462.58,-4500.6 h45
  text "NONE" at 8769.67,-4610.84 h45
  text "ISO9001/AS3901" at 7989.7,-4617.85 h45
  text "MANUFACTURER'S ACCREDITATION:" at 6462.58,-4622.65 h45
  text "X" at 7884.7,-4622.85 h45
  text "PACKAGING AND HANDLING:" at 6462.58,-4732.89 h45
  text "REFER" at 8767.66,-4741.31 h45
  text "PER ORDER" at 7988.92,-4745.25 h45
  text "X" at 7883.92,-4755.25 h45
  text "Notes" at 6163.37,-5047.85 h45
  text "1. All dimensions are in mm. The router cutter diameter is 2.4mm." at 6229.11,-5277.38 h45
Drill Drawing:
  text ".Legend" at -4838.57,3070.86 h60

## Dimensions
5137.8,-1468.51 to 5137.8,1468.5 on 6. FabNotes
-5307.09,-3.94 to 5307.09,-1299.21 on 6. FabNotes
5137.8,-1468.51 to 4921.26,-1334.65 on 6. FabNotes
-5307.09,3.92 to -4543.31,3.92 on 6. FabNotes
4724.41,0 to 5307.09,-1299.21 on 6. FabNotes
2362.2,0 to 4724.41,0 on 6. FabNotes
-2362.2,0 to 2362.2,0 on 6. FabNotes
-4724.41,0 to -2362.2,0 on 6. FabNotes
-5307.09,-1299.21 to -4724.41,0 on 6. FabNotes
4921.26,-1334.65 to 5307.09,-1299.21 on 6. FabNotes
1968.5,-1334.65 to 4921.26,-1334.65 on 6. FabNotes
-1968.5,-1334.65 to 1968.5,-1334.65 on 6. FabNotes
-4921.26,-1334.65 to -1968.5,-1334.65 on 6. FabNotes
-5307.09,-1299.21 to -4921.26,-1334.65 on 6. FabNotes
3543.31,1000.02 to 5137.8,1468.5 on 6. FabNotes
3543.31,-999.98 to 3543.31,1000.02 on 6. FabNotes
5137.8,-1468.51 to 3543.31,-999.98 on 6. FabNotes
-4724.41,0 to -5137.8,1468.5 on 6. FabNotes
-5137.8,-1468.51 to -4724.41,0 on 6. FabNotes
4543.3,3.92 to 5307.09,3.92 on 6. FabNotes
2543.31,0.02 to 4543.3,3.92 on 6. FabNotes
-2543.31,0 to 2543.31,0.02 on 6. FabNotes
-4543.31,3.92 to -2543.31,0 on 6. FabNotes
-5307.09,1299.21 to -5307.09,3.92 on 6. FabNotes
-1909.45,1397.64 to -1771.65,1586.61 on 6. FabNotes
-3543.31,0 to -2470.49,-456.43 on 6. FabNotes
-2275.36,63.63 to -2050.96,173.87 on 6. FabNotes
5137.8,1299.21 to 5402.38,1563.79 on 6. FabNotes

## Text inside footprints (layer, text, board x,y; h text height)
HDR1: Top Overlay "16" at -645.67,7.87 h50; Top Overlay "2" at 271.65,11.81 h50; Top Overlay "1" at 279.53,-90.55 h50; Top Overlay "15" at -645.67,-86.61 h50
LED1: Top Overlay "G" at 4868.94,-926.28 h31.5 r330; Top Overlay "A" at 4836.16,-884.62 h31.5 r330; Top Overlay "FLAT" at 4850.66,-1232.36 h45 r60; Top Overlay "R" at 4741.08,-852.46 h31.5 r330; Top Overlay "B" at 4783.7,-877.07 h31.5 r330
LED2: Top Overlay "B" at 1689.37,-800.79 h31.5; Top Overlay "R" at 1640.16,-800.79 h31.5; Top Overlay "FLAT" at 1925,-1075 h45 r90; Top Overlay "A" at 1738.58,-781.1 h31.5; Top Overlay "G" at 1787.8,-800.79 h31.5
LED3: Top Overlay "B" at 472.09,-912.1 h31.5 r30; Top Overlay "R" at 429.47,-936.71 h31.5 r30; Top Overlay "FLAT" at 813.26,-1031.76 h45 r120; Top Overlay "A" at 504.87,-870.45 h31.5 r30; Top Overlay "G" at 557.33,-862.89 h31.5 r30
LED4: Top Overlay "B" at -712.16,-877.07 h31.5 r330; Top Overlay "R" at -754.78,-852.46 h31.5 r330; Top Overlay "FLAT" at -645.21,-1232.36 h45 r60; Top Overlay "A" at -659.7,-884.62 h31.5 r330; Top Overlay "G" at -626.93,-926.28 h31.5 r330
LED5: Top Overlay "B" at -1710.63,-800.79 h31.5; Top Overlay "R" at -1759.84,-800.79 h31.5; Top Overlay "FLAT" at -1475,-1075 h45 r90; Top Overlay "A" at -1661.42,-781.1 h31.5; Top Overlay "G" at -1612.2,-800.79 h31.5
LED6: Top Overlay "B" at -4815.51,-887.7 h31.5 r30; Top Overlay "R" at -4858.13,-912.3 h31.5 r30; Top Overlay "FLAT" at -4474.34,-1007.36 h45 r120; Top Overlay "A" at -4782.73,-846.04 h31.5 r30; Top Overlay "G" at -4730.27,-838.48 h31.5 r30
PBFREE: Bottom Overlay "Pb" at 380.29,712.6 h120
SPKL1: Bottom Overlay "MOUNT SPEAKER THIS SIDE" at -2865.16,-1176.18 h78.74; Bottom Overlay "MINUS" at -4197,1063 h118.11; Bottom Overlay "PLUS" at -2605,1065 h118.11; 8. Assembly Bottom "Mount Speaker This Side" at -2992.13,-1141.73 h118.11
SPKR1: Bottom Overlay "PLUS" at 4478,1065 h118.11; Bottom Overlay "MINUS" at 2888,1063 h118.11; Bottom Overlay "MOUNT SPEAKER THIS SIDE" at 4277.56,-1181.1 h78.74; 8. Assembly Bottom "Mount Speaker This Side" at 4094.49,-1141.73 h118.11